# Altium PCB PROJECT NAME V1.1.PcbDoc
Units mm, origin at the board's own origin, x right, y up, seen from the top; angles counter-clockwise.
Board outline 100 x 100 mm, 2 copper layers (Top Layer, Bottom Layer), stack 1.27 mm thick; 1 components, 0 nets, 2 pads, 0 vias.
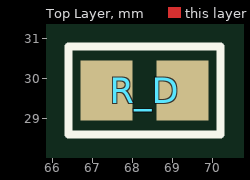
[diagram p0: Top Layer view]
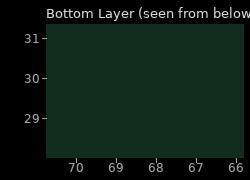
[diagram p1: Bottom Layer view, seen from below]

## Layer stack, top to bottom
Top Solder: solder mask 0.0102, Solder Resist, Dk 3.5
Top Layer: signal copper 0.035
Dielectric1: core 1.2, FR-4, Dk 4.8
Bottom Layer: signal copper 0.035
Bottom Solder: solder mask 0.0102, Solder Resist, Dk 3.5

## Board outline
0,0 100,0 100,100 0,100

## Design rules (kind name [scope] priority, off if disabled: settings)
AssemblyTestPointUsage [All] p1 off:
AssemblyTestpoint [All] p1 off: testpointundercomponent=TRUE minsize=1.016 maxsize=2.54 preferedsize=1.524 minholesize=0 maxholesize=1.016 preferedholesize=0.813 testpointgrid=0.025 usegrid=TRUE gridtolerance=0 allowsidetop=TRUE allowsidebottom=TRUE
BoardOutlineClearance [All] p1: gap=0.25 ignorepadtopadclearanceinfootprint=FALSE except(0: Arc-SplitContinuation Track-SplitContinuation SMDPad-SplitContinuation THPad-SplitContinuation Via-SplitContinuation Fill-SplitContinuation Poly-SplitContinuation Region-SplitContinuation Text-SplitContinuation)
Clearance Clearance-xPP-xTP-xTT [All] p1: gap=0.2 ignorepadtopadclearanceinfootprint=FALSE
ComponentClearance [All] p1: gap=0.25 collisioncheckmode=3 verticalgap=0.25 showdistances=FALSE
DiffPairsRouting [All] p1: maxlimit=0.25 minlimit=0.25 mostfreqgap=0.25 toplayer_minwidth=0.381 toplayer_maxwidth=0.381 toplayer_prefwidth=0.381 bottomlayer_minwidth=0.381 bottomlayer_maxwidth=0.381 bottomlayer_prefwidth=0.381 maxuncoupledlength=12.5
FabricationTestPointUsage [All] p1 off: valid=0 allowmultiple=FALSE
FabricationTestpoint [All] p1 off: side=3 testpointundercomponent=TRUE minsize=1.016 maxsize=2.54 preferedsize=1.524 minholesize=0 maxholesize=1.016 preferedholesize=0.813 testpointgrid=0.025 allowsidetop=TRUE allowsidebottom=TRUE usegrid=TRUE gridtolerance=0
Height [All] p1: minheight=0 maxheight=25 prefheight=12.5
HoleSize HoleSize-PTH [All] p1: absolutevalues=TRUE maxlimit=5 minlimit=0.25 maxpercent=80.000 minpercent=20.000
HoleToHoleClearance [All] p1: gap=0.35 allowstackedmicrovias=TRUE
MinimumAnnularRing "Minimum IAR  >0.45mm" [((ObjectKind = 'Pad') OR (ObjectKind = 'Via')) And (Layer = 'MultiLayer') And (HoleDiameter > AsMM(0.45))] p1: minimumring=0.175 // minimum inner annular ring for pads > 0.45mm finished hole size
MinimumAnnularRing "Minimum IAR <=0.45mm" [((ObjectKind = 'Pad') OR (ObjectKind = 'Via')) And (Layer = 'MultiLayer') And (HoleDiameter <= AsMM(0.45))] p2: minimumring=0.175 // minimum inner annular ring for pads <= 0.45mm finished hole size
MinimumSolderMaskSliver [All] p1: minsoldermaskwidth=0.08
PlaneClearance PlaneClearance-IPI [All] p1: clearance=0.25
PlaneConnect [All] p1: planeconnectstyle=Relief reliefexpansion=0.175 reliefentries=4 reliefconductorwidth=0.2 reliefairgap=0.2
PolygonConnect PolygonConnect-xTW [All] p1: connectstyle=Relief reliefconductorwidth=0.2 reliefentries=4 polygonreliefangle="90 Angle" airgapwidth=0.2
RoutingCorners [All] p1: cornerstyle=45-Degree minsetback=2.5 maxsetback=2.5
RoutingVias [All] p1: holewidth=0.3 width=0.65 viastyle="Through Hole" minholewidth=0.25 minwidth=0.6 maxholewidth=0.7 maxwidth=1.7 // finishet hole size <= 0.45mm
SilkToSilkClearance [All] p1: silktosilkclearance=0.2
SilkToSolderMaskClearance SilkscreenOverComponentPads [IsPad] p1: minsilkscreentomaskgap=0.2 clearancetoexposedcopper=TRUE
SolderMaskExpansion [All] p1: expansion=0 istentingtop=FALSE
UnRoutedNet [All] p1: checkbadconnections=TRUE
Width Width-xTW [All] p1: maxlimit=1.5 minlimit=0.15 preferedwidth=0.2
14 further rules are at their usual default settings.

## Components (designator, comment, footprint, x,y, rotation, side; value= is the part's Value field where it differs from the comment)
R_D "1k" R0805 68.3,29.7 r0 top

## Footprints (in the part's own frame and the unit in brackets; to place one, negate y for a bottom-side part, rotate by r counter-clockwise, add the part's x,y. Pads: shape width x height; smd on the part's side, far side on the other; paste and mask are expansions set on the pad)
R0805 [mm]
  rect 1.3x1.5 smd mask+0.102: 1(-0.95,0) 2(0.95,0)
  silkscreen extent -1.9,-1.1 1.9,1.1, body extent -1.05,-0.67 1.05,0.68, height 0.6

## Part data
R_D: library part CRCW08051K00FKEA, "RES 1K 0805 0.125W", Manufacturer="Vishay Dale", Operating Temperature="-55°C ~ 155°C", Package="0805 (2012 Metric)", Power (Watts)="0.125W, 1/8W", Supplier Device Package=0805, Temperature Coefficient=±100ppm/°C, Tolerance=±1%, .PCBChecked=BP, .SCHChecked=BP, Category=Resistors, ComponentLink1Description=Datasheet, ComponentLink1URL=http://www.vishay.com/docs/20035/dcrcwe3.pdf, Composition="Thick Film", Failure Rate=-, Features="Automotive AEC-Q200", Height - Seated (Max)="0.020\" (0.50mm)", Manufacturer Part Number=CRCW08051K00FKEA, Packaging="Cut Tape (CT)", Part Status=Active, Pricing 1="1=0.1, 10=0.042, 25=0.0304, 50=0.0232, 100=0.017, 250=0.013, 500=0.0104, 1000=0.00765 (USD)", Resistance (Ohms)=1k, RoHS="RoHS Compliant", Size / Dimension="0.079\" L x 0.049\" W (2.00mm x 1.25mm)", Stock 1=528553, Supplier 1="Avnet Abacus", Supplier Part Number 1=CRCW08051K00FKEA, Type=SMD

## Nets (pads, with @x,y where several pads share a name; then routed paths per layer and width w, separated by ;. In a path a pad name is that pad's centre, name@x,y a point inside that pad or via, vN(x,y) a via of type N, cw(c..) or ccw(c..) an arc to the next point about the centre after c; other vN are vias at no path point)
pads on no net: R_D.1 R_D.2

## Other copper
Top Layer:
  text "TOP" at 90.2,94.2 h1.52
Bottom Layer:
  text "BOT" at 94.2,94.2 h1.52

## Silkscreen, mask and mechanical layers (free items; w line width, h text height)
Top Overlay:
  text ".Company" at 73.7,6.7 h1.52
  text ".Title" at 72.3,3 h1.52
Drill Drawing:
  lines w0.381: 14.183,-39.809 14.183,-32.189 ; 25.204,-39.809 25.204,-32.189 ; 43.538,-39.809 43.538,-32.189 ; 56.387,-39.809 56.387,-32.189 ; 75.025,-39.809 75.025,-32.189 ; 90.008,-39.809 90.008,-32.189 ; 0.191,-39.809 110.094,-39.809 110.094,-32.189 0.191,-32.189 0.191,-39.809 ; 0.191,-35.999 110.094,-35.999 0.191,-35.999
  text "Symbol" at 2.476,-34.856 h1.83
  text "Count" at 15.326,-34.856 h1.83
  text "Hole Size" at 26.347,-34.856 h1.83
  text "Plated" at 44.681,-34.856 h1.83
  text "Hole Type" at 57.53,-34.856 h1.83
  text "Via/Pad" at 76.168,-34.856 h1.83
  text "Pad Shape" at 91.151,-34.856 h1.83
Fab Notes:
  drawing of 178 lines, arcs and shapes, not listed
  text "DESIGN INFORMATION" at -72.6,117.4 h1.52
  text "X" at -79.896,111.427 h1.52
  text "BOARD TYPE:" at -97.1,111.4 h1.52
  text "SINGLE PIECES" at -75.6,111.4 h1.52
  text "PANEL BY CUSTOMER" at -53.6,111.4 h1.52
  text "PANEL BY PCBWAY" at -75.6,106.9 h1.52
  text "DIFFERENT DESIGN IN PANEL:" at -97.1,102.4 h1.52
  text "1" at -63.846,102.4 h1.52
  text "SIZE (LENGTH X WIDTH):" at -97.1,98.303 h1.52
  text "205" at -65.624,98.15 h1.52
  text "X" at -59.6,98.15 h1.52
  text "20" at -55.1,98.15 h1.52
  text "mm" at -49.6,98.15 h1.52
  text "QUANTITY:" at -97.1,93.9 h1.52
  text "10" at -64.735,93.9 h1.52
  text "LAYERS:" at -97.1,89.9 h1.52
  text "2" at -64.1,89.9 h1.52
  text "X" at -79.896,84.927 h1.52
  text "NORMAL FR-4" at -75.6,84.9 h1.52
  text "ALUMINIUM" at -53.6,84.9 h1.52
  text "MATERIAL:" at -97.1,84.7 h1.52
  text "RIGID-FLEX" at -75.6,80.4 h1.52
  text "THICKNESS:" at -97.1,74.9 h1.52
  text "0.4" at -75.6,74.9 h1.52
  text "0.6" at -63.6,74.9 h1.52
  text "0.8" at -51.1,74.9 h1.52
  text "1.0" at -39.6,74.9 h1.52
  text "mm" at -33.6,73.793 h1.52
  text "1.2" at -75.6,70.4 h1.52
  text "1.6" at -63.6,70.4 h1.52
  text "2.0" at -51.1,70.4 h1.52
  text "2.4" at -39.6,70.4 h1.52
  text "X" at -67.9,70.3 h1.52
  text "X" at -43.896,64.927 h1.52
  text "MIN TRACK/SPACING:" at -97.1,64.9 h1.52
  text "4/4" at -63.6,64.9 h1.52
  text "5/5" at -51.1,64.9 h1.52
  text "6/6" at -39.6,64.9 h1.52
  text "mil" at -33.6,63.394 h1.52
  text "X" at -43.896,59.427 h1.52
  text "0.2" at -63.6,59.4 h1.52
  text "0.25" at -51.1,59.4 h1.52
  text "0.3" at -39.6,59.4 h1.52
  text "MIN HOLE SIZE:" at -97.1,59.182 h1.52
  text "mm" at -33.6,58.002 h1.52
  text "X" at -74.646,53.677 h1.52
  text "SOLDER MASK:" at -97.1,53.65 h1.52
  text "GREEN" at -70.35,53.65 h1.52
  text "RED" at -54.85,53.65 h1.52
  text "YELLOW" at -40.6,53.65 h1.52
  text "BLUE" at -70.35,49.15 h1.52
  text "WHITE" at -54.85,49.15 h1.52
  text "BLACK" at -40.35,49.15 h1.52
  text "X" at -74.646,43.927 h1.52
  text "SILKSCREEN:" at -97.1,43.9 h1.52
  text "WHITE" at -70.35,43.9 h1.52
  text "BLACK" at -54.85,43.9 h1.52
  text "GOLD FINGERS:" at -97.1,38.65 h1.52
  text "YES" at -70.35,38.65 h1.52
  text "X" at -59.1,38.65 h1.52
  text "NO" at -54.85,38.65 h1.52
  text "SURFACE FINISH:" at -97.1,33.4 h1.52
  text "X" at -49.3,33.25 h1.52
  text "HASL WITH LEAD" at -70.4,33.2 h1.52
  text "HASL LEAD FREE" at -45.1,33.2 h1.52
  text "IMMERSION GOLD" at -70.4,28.9 h1.52
  text "HARD GOLD" at -45.1,28.8 h1.52
  text "CHANGE TO ENIG (FREE OF CHARGE):" at -97.1,23.2 h1.52
  text "X" at -54.5,23.1 h1.52
  text "YES" at -50.25,23.05 h1.52
  text "NO" at -34.75,23.05 h1.52
  text "PLUGGED VIAS" at -54.4,17.55 h1.52
  text "X" at -79.746,17.477 h1.52
  text "TENTING VIAS" at -75.45,17.45 h1.52
  text "VIA PROCESS:" at -97.1,17.4 h1.52
  text "VIAS NOT COVERED" at -75.5,12.65 h1.52
  text "FINISHED COPPER:" at -97.1,7.3 h1.52
  text "X" at -75.2,7.3 h1.52
  text "1 OZ (35um)" at -71,7.2 h1.52
  text "2 OZ (70um)" at -49.2,7.1 h1.52
  text "3 OZ (105um)" at -70.9,2.7 h1.52
Board Outline:
  the board outline again, w0.2